# Altium PCB YAVP.PcbDoc (part 4 of 4)
Units mil, origin at the board's own origin, x right, y up, seen from the top; angles counter-clockwise.
Board outline 3188.93 x 2893.7 mil, 6 copper layers (Top Layer, Top, Mid-Layer 1, Top-Int, Mid-Layer 2, Bop-Int, Mid-Layer 3, Top-Mid, Mid-Layer 4, Bop-Mid, Bottom Layer, Bottom); 418 components, 278 nets, 1150 pads, 440 vias.
Unrouted connection lines stored in the file: 12.
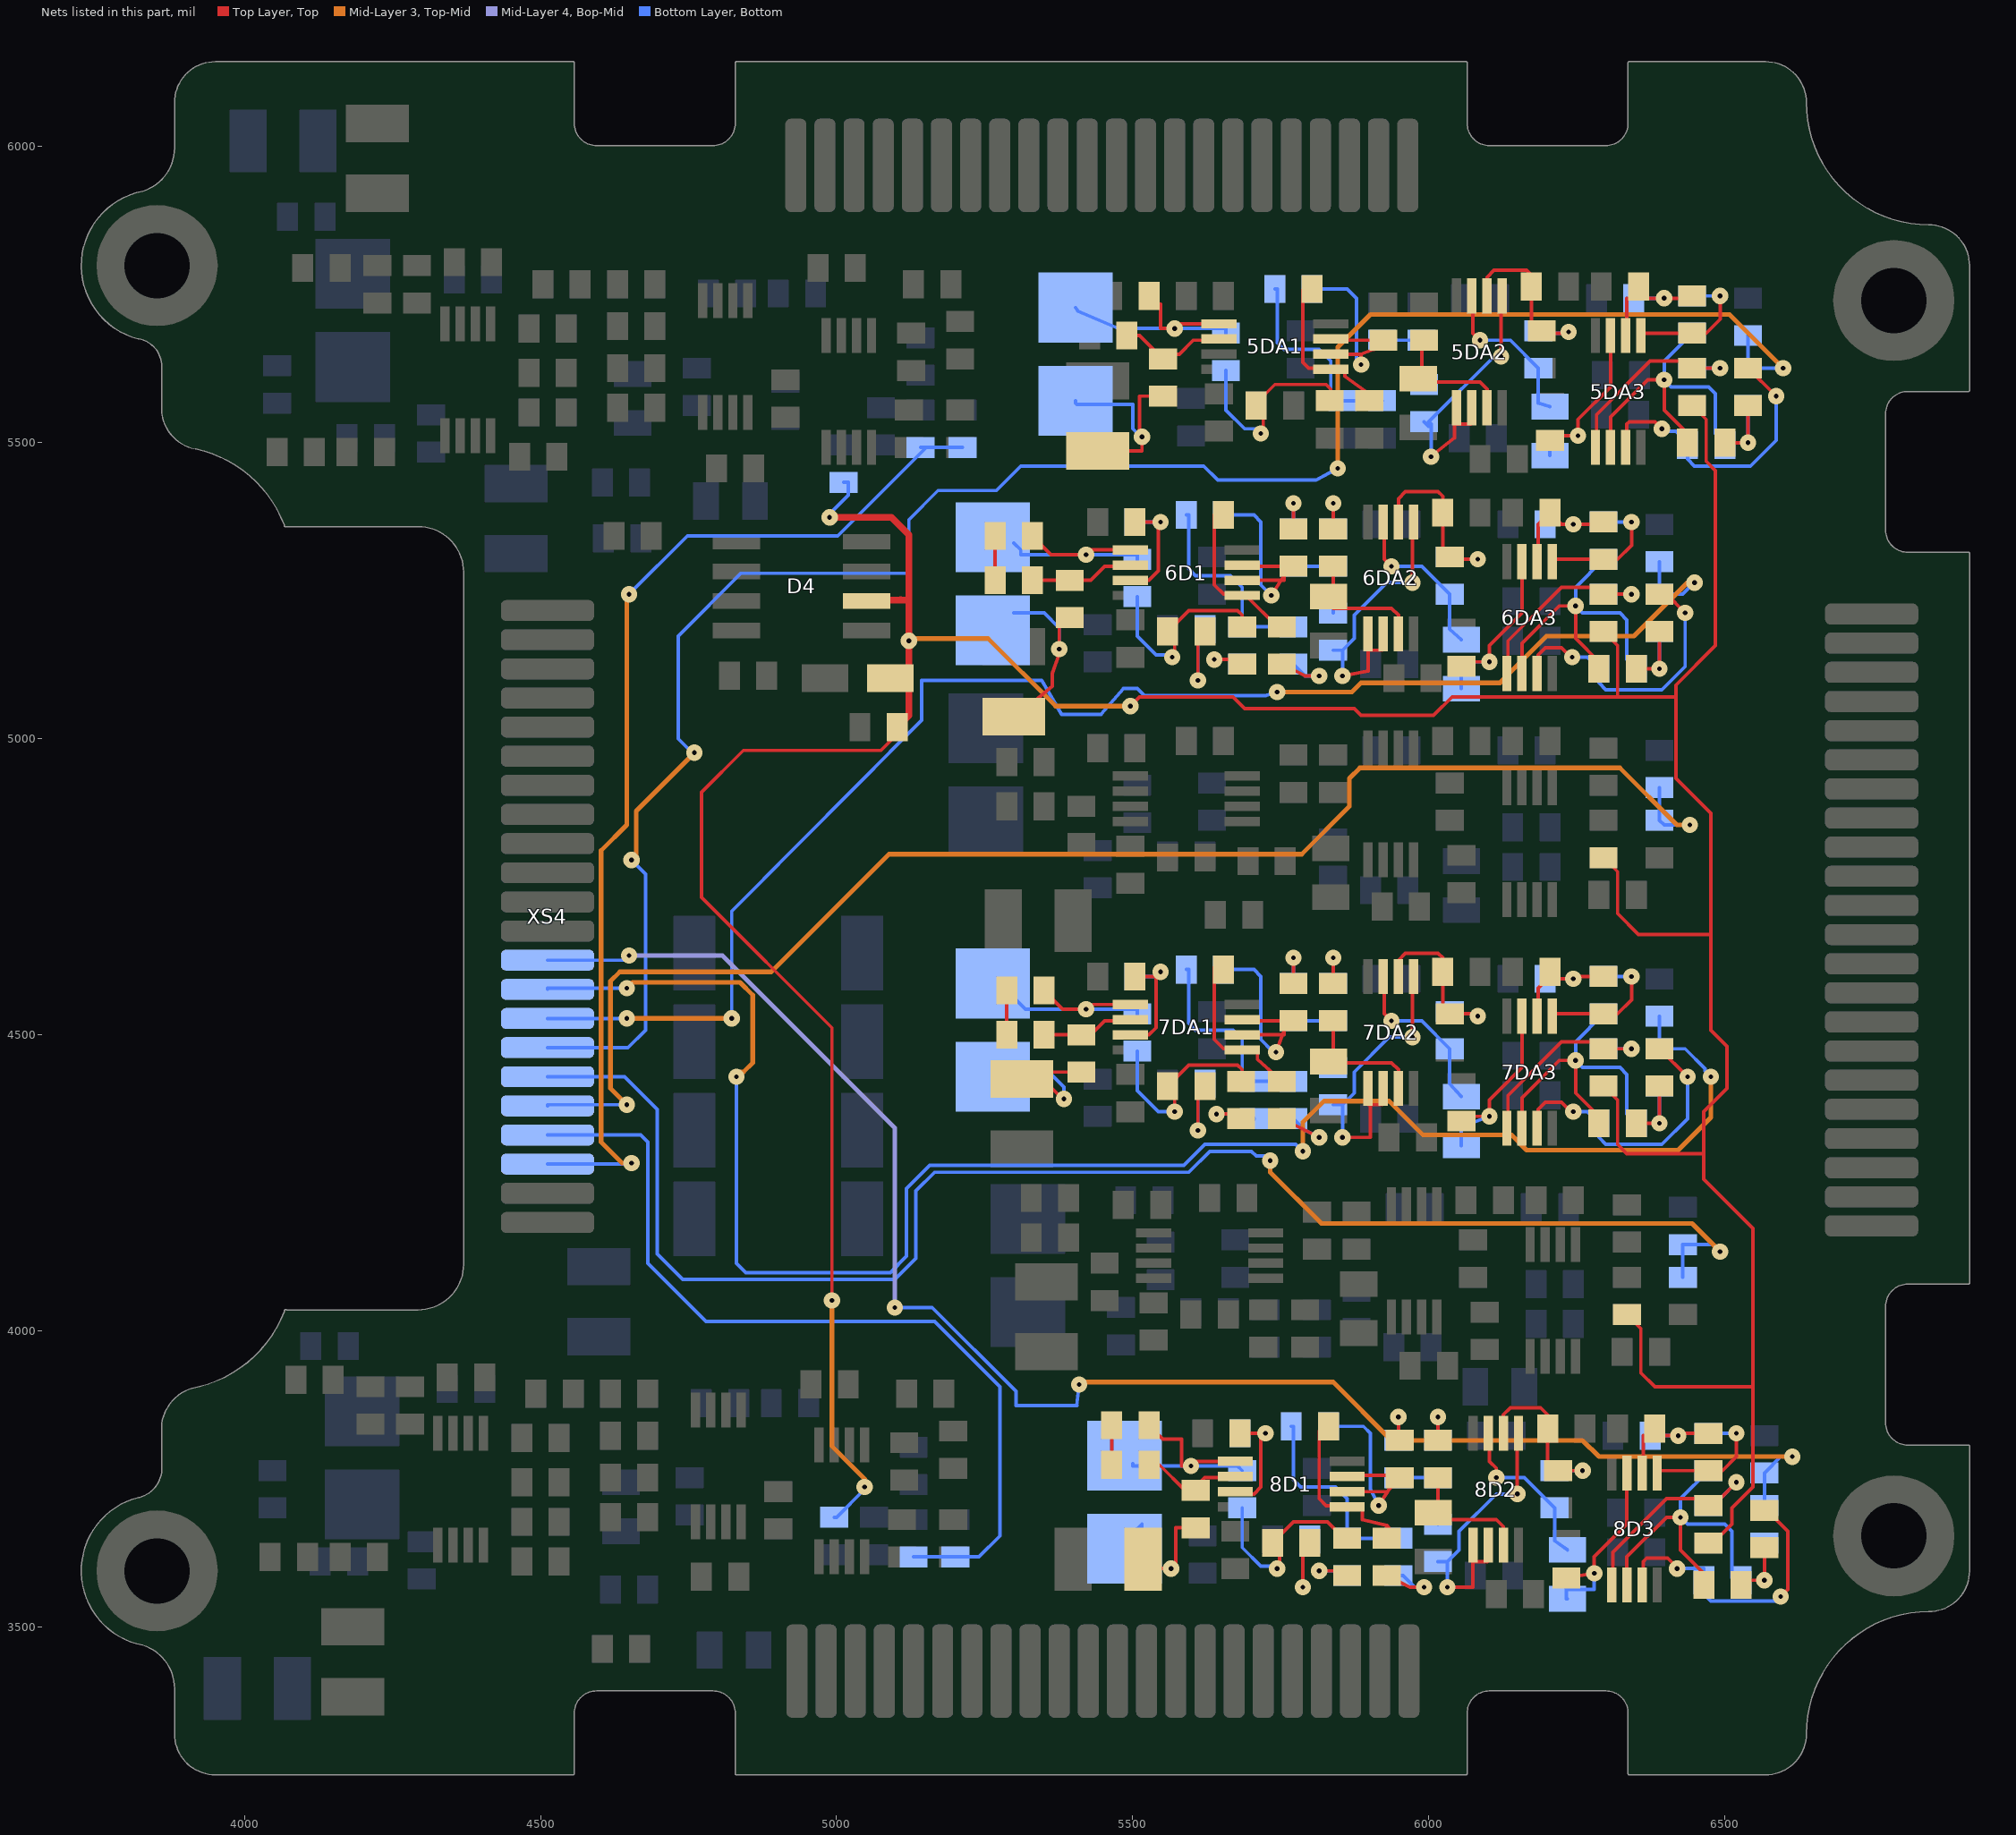
[diagram p8: the nets of this part, all layers, seen from the top]

## Via types
v1: diameter 27.56, hole 7.87, Top Layer, Top to Bottom Layer, Bottom, 440 vias

## Nets (pads, with @x,y where several pads share a name; then routed paths per layer and width w, separated by ;. In a path a pad name is that pad's centre, name@x,y a point inside that pad or via, vN(x,y) a via of type N, cw(c..) or ccw(c..) an arc to the next point about the centre after c; other vN are vias at no path point) (continued)
NET00479: 5C3.1 5DA1.1 5R4.1 5R5.2 | length 447.3
  Top Layer, Top w5.91: 5R4.1@5527.56,5748.03 5523.62,5748.03 5537.4,5734.25 5547.24,5734.25 5547.24,5692.91 v1(5570.87,5692.91) 5578.74,5700.79 5DA1.1@5645.67,5700.79
  Bottom Layer, Bottom w5.91: 5C3.1@5403.54,5728.35 5407.48,5722.44 5476.38,5692.91 v1(5570.87,5692.91) 5657.48,5692.91 5R5.2@5657.48,5685.04
NET00480: 5C1.2 5C3.2 5R1.2 | length 405.9
  Top Layer, Top w5.91: 5C1.2@5440.94,5486.22 5515.75,5486.22 v1(5515.75,5509.84) 5513.78,5509.84 5511.81,5511.81 5511.81,5578.74 5R1.2@5551.18,5578.74 5R1.2@5555.12,5574.8 ; 5R1.2@5555.12,5574.8 5562.99,5574.8 5562.99,5566.93 5R1.2@5555.12,5574.8
  Bottom Layer, Bottom w5.91: 5C3.2@5403.54,5570.87 5403.54,5566.93 5405.51,5564.96 5500,5564.96 5500,5523.62 5513.78,5509.84 v1(5515.75,5509.84)
NET00481: 5DA1.2 5R1.1 5R3.2 | length 186.8
  Top Layer, Top w5.91: 5R3.2@5490.16,5681.1 5511.81,5681.1 5R1.1@5551.18,5641.73 5559.06,5649.61 5578.74,5649.61 5602.36,5673.23 5645.67,5673.23 5DA1.2@5645.67,5675.2
NET00482: 5R5.1 5R6.2 5R8.2 | length 368.3
  Top Layer, Top w5.91: 5R6.2@5708.66,5562.99 5R6.2@5720.47,5562.99 ; v1(5716.54,5515.75) 5720.47,5519.69 5R6.2@5720.47,5562.99 ; 5R8.2@5832.68,5570.87 5834.65,5570.87 5834.65,5590.55 5826.77,5598.43 5740.16,5598.43 5720.47,5578.74 5R6.2@5720.47,5562.99
  Bottom Layer, Bottom w5.91: 5R5.1@5657.48,5622.05 5657.48,5555.12 5688.98,5523.62 5712.6,5523.62 5712.6,5519.69 v1(5716.54,5515.75)
NET00483: 5C4.1 5R9.1 5R10.2 | length 371.3
  Bottom Layer, Bottom w5.91: 5C4.1@5740.16,5759.84 5744.09,5759.84 5744.09,5669.29 5755.91,5657.48 5814.96,5657.48 5834.65,5637.8 5R9.1@5834.65,5570.87 ; 5R9.1@5854.33,5570.87 5R9.1@5834.65,5570.87 ; 5R10.2@5921.26,5570.87 5R9.1@5834.65,5570.87
NET00484: 5C5.1 5DA1.5 5R11.1 | length 313.6
  Top Layer, Top w5.91: 5C5.1@5803.15,5759.84 5793.31,5759.84 5789.37,5759.84 5787.4,5757.87 5787.4,5635.83 5797.24,5625.98 5807.09,5625.98 5834.65,5625.98 5DA1.5@5834.65,5624.02 5858.27,5624.02 5858.27,5612.2 5915.35,5570.87 5R11.1@5899.61,5570.87
NET00485: 5C4.2 5DA1.6 5DA1.7 5R12.2 | length 418.1
  Top Layer, Top w5.91: 5DA1.6@5834.65,5649.61 5885.83,5649.61 ; 5DA1.7@5834.65,5675.2 5834.65,5673.23 5R12.2@5905.51,5673.23 ; v1(5885.83,5631.89) 5885.83,5649.61 ; 5885.83,5649.61 5R12.2@5905.51,5657.48 ; 5R12.2@5905.51,5657.48 5907.48,5657.48 5R12.2@5923.23,5673.23 5R12.2@5905.51,5673.23 ; 5R12.2@5905.51,5657.48 5R12.2@5905.51,5673.23
  Bottom Layer, Bottom w5.91: 5C4.2@5803.15,5759.84 5862.2,5759.84 5877.95,5744.09 5877.95,5637.8 v1(5885.83,5631.89)
NET00486: 5C7.1 5DA2.3 5R15.1 | length 224.7
  Top Layer, Top w5.91: 5C7.1@5992.13,5598.43 5C7.1@5988.19,5602.36 ; 5R15.1@5992.13,5673.23 5988.19,5669.29 5C7.1@5988.19,5602.36 ; 5DA2.3@6098.43,5559.06 6098.43,5590.55 6086.61,5602.36 5C7.1@5988.19,5602.36
NET00487: 5C6.1 5R13.1 5R14.2 | length 143.4
  Bottom Layer, Bottom w5.91: 5R13.1@5921.26,5673.23 5R14.2@5988.19,5673.23 5988.19,5602.36 5C6.1@5992.13,5598.43
NET00488: 5C8.1 5DA2.7 5R17.1 | length 279.3
  Top Layer, Top w5.91: 5DA2.7@6072.83,5748.03 6074.8,5748.03 6074.8,5685.04 v1(6086.61,5673.23)
  Bottom Layer, Bottom w5.91: v1(6086.61,5673.23) 6137.8,5673.23 5R17.1@6185.04,5625.98 6185.04,5566.93 5C8.1@6204.72,5561.02
NET00489: 5C6.2 5DA2.1 5DA2.2 5DA2.5 | length 509.8
  Top Layer, Top w5.91: v1(6003.94,5476.38) 6007.87,5480.31 6043.31,5507.87 6043.31,5531.5 5DA2.1@6047.24,5531.5 ; 5DA2.1@6047.24,5559.06 6047.24,5539.37 5DA2.1@6047.24,5531.5 ; 5DA2.2@6072.83,5559.06 6070.87,5559.06 6070.87,5531.5 5DA2.1@6047.24,5531.5 ; v1(6122.05,5645.67) 6122.05,5748.03 5DA2.5@6124.02,5748.03
  Bottom Layer, Bottom w5.91: 5C6.2@5992.13,5535.43 6000,5527.56 5C6.2@6003.94,5527.56 ; v1(6003.94,5476.38) 5C6.2@6003.94,5527.56 ; v1(6122.05,5645.67) 6118.11,5645.67 6114.17,5649.61 6000,5535.43 6003.94,5531.5 5C6.2@6003.94,5527.56
NET00490: 5DA2.6 5R16.1 5R17.2 5R18.1 | length 338.2
  Top Layer, Top w5.91: 5DA2.6@6098.43,5748.03 6098.43,5779.53 6110.24,5791.34 6165.35,5791.34 6173.23,5783.46 5R16.1@6173.23,5763.78 6173.23,5685.04 6181.1,5685.04 6187.01,5685.04 5R18.1@6188.98,5687.01 ; 5R18.1@6190.94,5688.98 5R18.1@6188.98,5687.01 ; v1(6236.22,5687.01) 6234.25,5685.04 6188.98,5685.04 5R18.1@6188.98,5687.01
  Bottom Layer, Bottom w5.91: 5R17.2@6185.04,5688.98 6185.04,5685.04 6234.25,5685.04 v1(6236.22,5687.01)
NET00493: 5C8.2 5DA3.3 5R19.1 | length 327.9
  Top Layer, Top w5.91: 5R19.1@6204.72,5503.94 6204.72,5511.81 v1(6251.97,5511.81) 6251.97,5539.37 6307.09,5594.49 5DA3.3@6307.09,5681.1
  Bottom Layer, Bottom w5.91: 5C8.2@6204.72,5478.35 6204.72,5511.81 v1(6251.97,5511.81)
NET00494: 5DA3.2 5R20.1 5R21.2 5R22.1 | length 255.8
  Top Layer, Top w5.91: 5DA3.2@6332.68,5681.1 6334.65,5681.1 6334.65,5744.09 6342.52,5744.09 6342.52,5751.97 5R20.1@6354.33,5763.78 6366.14,5751.97 6366.14,5744.09 v1(6397.64,5744.09) 6444.88,5744.09 5R21.2@6444.88,5748.03
  Bottom Layer, Bottom w5.91: 5R22.1@6346.46,5744.09 v1(6397.64,5744.09)
NET00495: 5DA3.1 5R21.1 5R23.2 | length 234.2
  Top Layer, Top w5.91: 5DA3.1@6358.27,5681.1 6358.27,5685.04 5R21.1@6444.88,5685.04 6468.5,5685.04 6492.13,5708.66 v1(6492.13,5748.03)
  Bottom Layer, Bottom w5.91: 5R23.2@6444.88,5748.03 v1(6492.13,5748.03)
NET00498: 5C9.1 5DA3.6 5R23.1 5R26.2 | length 577.3
  Top Layer, Top w5.91: 5DA3.6@6307.09,5492.13 6307.09,5543.31 6370.08,5606.3 v1(6397.64,5606.3) 6397.64,5555.12 6437.01,5515.75 5R26.2@6437.01,5500
  Bottom Layer, Bottom w5.91: 5R23.1@6444.88,5685.04 6397.64,5637.8 v1(6397.64,5606.3) 6409.45,5594.49 6472.44,5594.49 6484.25,5582.68 6484.25,5515.75 5C9.1@6500,5496.06
NET00499: 5C9.2 5DA3.7 5R27.2 | length 500.6
  Top Layer, Top w5.91: 5DA3.7@6332.68,5492.13 6334.65,5492.13 6334.65,5531.5 6338.58,5535.43 6381.89,5535.43 v1(6393.7,5523.62) ; 5R27.2@6539.37,5625.98 v1(6586.61,5578.74)
  Bottom Layer, Bottom w5.91: v1(6393.7,5523.62) 6397.64,5519.69 6417.32,5519.69 5C9.2@6437.01,5496.06 6437.01,5472.44 6448.82,5460.63 6543.31,5460.63 6586.61,5503.94 v1(6586.61,5578.74)
NET00500: 5R26.1 5R27.1 5R28.1 | length 165.4
  Top Layer, Top w5.91: 5R26.1@6500,5500 v1(6539.37,5500) 5R27.1@6539.37,5562.99
  Bottom Layer, Bottom w5.91: v1(6539.37,5500) 5R28.1@6539.37,5562.99
NET00502: 5DA3.5 5R24.1 5R25.1 | length 362.3
  Top Layer, Top w5.91: 5DA3.5@6281.5,5492.13 6283.46,5492.13 6283.46,5547.24 6374.02,5637.8 6444.88,5637.8 5R24.1@6444.88,5625.98 v1(6492.13,5625.98)
  Bottom Layer, Bottom w5.91: 5R25.1@6444.88,5625.98 v1(6492.13,5625.98)
NET00504: 6R3.1 6R4.2 | length 74.8
  Top Layer, Top w5.91: 6R3.1@5267.72,5267.72 6R4.2@5267.72,5342.52
NET00505: 6R8.1 6R9.2 | length 110.2
  Top Layer, Top w5.91: v1(5637.8,5133.86) 5685.04,5133.86 6R8.1@5685.04,5125.98
  Bottom Layer, Bottom w5.91: v1(5637.8,5133.86) 5685.04,5133.86 6R9.2@5685.04,5125.98
NET00506: 6R12.1 6R13.2 | length 86.6
  Top Layer, Top w5.91: 6R12.1@5771.65,5354.33 v1(5771.65,5397.64)
  Bottom Layer, Bottom w5.91: 6R13.2@5771.65,5354.33 v1(5771.65,5397.64)
NET00507: 6R6.1 6R7.2 | length 190.6
  Top Layer, Top w5.91: v1(5610.24,5098.43) 5610.24,5181.1 6R6.1@5622.05,5181.1
  Bottom Layer, Bottom w5.91: v1(5610.24,5098.43) 5610.24,5181.1 5618.11,5181.1 6R7.2@5622.05,5185.04
NET00508: 6R10.1 6R11.2 | length 119.1
  Top Layer, Top w5.91: 6R11.2@5751.97,5125.98 5791.34,5106.3 v1(5814.96,5106.3)
  Bottom Layer, Bottom w5.91: 6R10.1@5771.65,5125.98 5791.34,5106.3 v1(5814.96,5106.3)
NET00509: 6R14.1 6R15.2 | length 86.6
  Top Layer, Top w5.91: 6R15.2@5838.58,5354.33 v1(5838.58,5397.64)
  Bottom Layer, Bottom w5.91: 6R14.1@5838.58,5354.33 v1(5838.58,5397.64)
NET00511: 6C2.1 6D1.3 6R2.1 | length 223.1
  Top Layer, Top w5.91: 6D1.3@5496.06,5267.72 5527.56,5267.72 5543.31,5283.46 v1@5543.31,5366.14 ; 6C2.1@5503.94,5366.14 v1@5543.31,5366.14 ; v1(5547.24,5366.14) v1@5543.31,5366.14
  Bottom Layer, Bottom w5.91: 6R2.1@5503.94,5366.14 v1(5547.24,5366.14)
NET00512: 6C3.1 6D1.1 6R4.1 6R5.2 | length 411
  Top Layer, Top w5.91: 6R4.1@5330.71,5342.52 5362.2,5311.02 v1(5421.26,5311.02) 5429.13,5318.9 6D1.1@5496.06,5318.9
  Bottom Layer, Bottom w5.91: 6C3.1@5299.21,5330.71 5311.02,5318.9 5311.02,5311.02 v1(5421.26,5311.02) 5507.87,5311.02 6R5.2@5507.87,5303.15
NET00513: 6C1.2 6C3.2 6R1.2 | length 383.1
  Top Layer, Top w5.91: 6C1.2@5299.21,5037.4 5303.15,5037.4 5364.17,5088.58 5364.17,5110.24 5375.98,5143.7 v1(5375.98,5151.57) 5375.98,5198.82 6R1.2@5399.61,5198.82 ; 6R1.2@5393.7,5204.72 6R1.2@5399.61,5198.82 ; 6R1.2@5399.61,5198.82 5407.48,5198.82 5413.39,5192.91 5405.51,5192.91 6R1.2@5399.61,5198.82
  Bottom Layer, Bottom w5.91: 6C3.2@5299.21,5212.6 5350.39,5212.6 5375.98,5187.01 v1(5375.98,5151.57)
NET00514: 6D1.2 6R1.1 6R3.2 | length 175.6
  Top Layer, Top w5.91: 6R3.2@5330.71,5267.72 6R1.1@5393.7,5267.72 5429.13,5267.72 5452.76,5291.34 5492.13,5291.34 6D1.2@5496.06,5293.31
NET00515: 6R5.1 6R6.2 6R8.2 | length 361
  Top Layer, Top w5.91: v1(5566.93,5137.8) 5570.87,5141.73 5570.87,5181.1 6R6.2@5559.06,5181.1 5594.49,5216.54 5677.17,5216.54 5685.04,5208.66 6R8.2@5685.04,5188.98
  Bottom Layer, Bottom w5.91: 6R5.1@5507.87,5240.16 5507.87,5173.23 5539.37,5141.73 5562.99,5141.73 v1(5566.93,5137.8)
NET00516: 6C4.1 6R9.1 6R10.2 | length 351.6
  Bottom Layer, Bottom w5.91: 6C4.1@5590.55,5377.95 5594.49,5377.95 5594.49,5287.4 5606.3,5275.59 5665.35,5275.59 5685.04,5255.91 6R9.1@5685.04,5188.98 6R10.2@5771.65,5188.98
NET00517: 6C5.1 6D1.5 6R11.1 | length 303.3
  Top Layer, Top w5.91: 6C5.1@5653.54,5377.95 5637.8,5377.95 5637.8,5259.84 5653.54,5244.09 5657.48,5244.09 5685.04,5244.09 6D1.5@5685.04,5242.13 5685.04,5240.16 5692.91,5240.16 5744.09,5188.98 5763.78,5188.98 6R11.1@5751.97,5188.98
NET00518: 6C4.2 6D1.6 6D1.7 6R12.2 | length 434.3
  Top Layer, Top w5.91: 6D1.6@5685.04,5267.72 5750.81,5267.72 ; 6D1.7@5685.04,5293.31 5685.04,5291.34 5755.91,5291.34 6R12.2@5755.91,5275.59 ; v1(5734.25,5242.13) 5750.81,5267.72 ; 6R12.2@5771.65,5291.34 6R12.2@5755.91,5275.59 ; 5750.81,5267.72 6R12.2@5755.91,5275.59 ; 5750.81,5267.72 5755.91,5267.72 6R12.2@5755.91,5275.59
  Bottom Layer, Bottom w5.91: 6C4.2@5653.54,5377.95 5704.72,5377.95 5716.54,5366.14 5716.54,5259.84 5736.22,5240.16 v1(5734.25,5242.13)
NET00519: 6C7.1 6DA2.3 6R15.1 | length 225.4
  Top Layer, Top w5.91: 6C7.1@5830.71,5240.16 6C7.1@5838.58,5240.16 ; 6R15.1@5838.58,5291.34 6C7.1@5838.58,5240.16 ; 6DA2.3@5948.82,5177.17 5948.82,5208.66 5937.01,5220.47 5838.58,5220.47 6C7.1@5838.58,5240.16
NET00520: 6C6.1 6R13.1 6R14.2 | length 145.7
  Bottom Layer, Bottom w5.91: 6R13.1@5771.65,5291.34 6R14.2@5838.58,5291.34 6C6.1@5838.58,5212.6
NET00521: 6C8.1 6DA2.7 6R17.1 | length 285.2
  Top Layer, Top w5.91: 6DA2.7@5923.23,5366.14 5925.2,5366.14 5925.2,5303.15 v1(5937.01,5291.34)
  Bottom Layer, Bottom w5.91: v1(5937.01,5291.34) 5988.19,5291.34 6R17.1@6035.43,5244.09 6035.43,5185.04 6C8.1@6055.12,5167.32
NET00522: 6C6.2 6DA2.1 6DA2.2 6DA2.5 | length 510.5
  Top Layer, Top w5.91: v1(5854.33,5106.3) 5897.64,5114.17 6DA2.1@5897.64,5149.61 ; 6DA2.1@5897.64,5177.17 6DA2.1@5897.64,5149.61 ; 6DA2.2@5923.23,5177.17 5921.26,5177.17 5921.26,5149.61 6DA2.1@5897.64,5149.61 ; v1(5972.44,5263.78) 5972.44,5362.2 6DA2.5@5974.41,5366.14
  Bottom Layer, Bottom w5.91: 6C6.2@5838.58,5149.61 6C6.2@5854.33,5149.61 ; v1(5854.33,5106.3) 6C6.2@5854.33,5149.61 ; v1(5972.44,5263.78) 5964.57,5263.78 5929.13,5263.78 5874.02,5208.66 5874.02,5169.29 6C6.2@5854.33,5149.61
NET00523: 6DA2.6 6R16.1 6R17.2 6R18.1 | length 346.4
  Top Layer, Top w5.91: 6DA2.6@5948.82,5366.14 5948.82,5405.51 5960.63,5417.32 6015.75,5417.32 6023.62,5409.45 6023.62,5397.64 6R16.1@6023.62,5381.89 6023.62,5303.15 6031.5,5303.15 6037.4,5303.15 6R18.1@6039.37,5305.12 ; 6R18.1@6035.43,5307.09 6037.4,5305.12 6R18.1@6039.37,5305.12 ; v1(6082.68,5303.15) 6039.37,5303.15 6R18.1@6039.37,5305.12
  Bottom Layer, Bottom w5.91: 6R17.2@6035.43,5307.09 6035.43,5303.15 v1(6082.68,5303.15)
NET00526: 6C8.2 6DA3.3 6R19.1 | length 339.8
  Top Layer, Top w5.91: 6R19.1@6055.12,5122.05 6055.12,5129.92 v1(6102.36,5129.92) 6102.36,5157.48 6157.48,5212.6 6DA3.3@6157.48,5299.21
  Bottom Layer, Bottom w5.91: 6C8.2@6055.12,5084.65 6055.12,5088.58 6055.12,5129.92 v1(6102.36,5129.92)
NET00527: 6DA3.2 6R20.1 6R21.2 6R22.1 | length 242.7
  Top Layer, Top w5.91: 6DA3.2@6183.07,5299.21 6185.04,5299.21 6185.04,5362.2 6R20.1@6204.72,5381.89 6224.41,5362.2 v1(6244.09,5362.2) 6295.28,5362.2 6R21.2@6295.28,5366.14
  Bottom Layer, Bottom w5.91: 6R22.1@6196.85,5362.2 v1(6244.09,5362.2)
NET00528: 6DA3.1 6R21.1 6R23.2 | length 234.2
  Top Layer, Top w5.91: 6DA3.1@6208.66,5299.21 6208.66,5303.15 6R21.1@6295.28,5303.15 6318.9,5303.15 6342.52,5326.77 v1(6342.52,5366.14)
  Bottom Layer, Bottom w5.91: 6R23.2@6295.28,5366.14 v1(6342.52,5366.14)
NET00531: 6C9.1 6DA3.6 6R23.1 6R26.2 | length 574.3
  Top Layer, Top w5.91: 6DA3.6@6157.48,5110.24 6157.48,5161.42 6220.47,5224.41 v1(6248.03,5224.41) 6248.03,5169.29 6287.4,5129.92 6R26.2@6287.4,5118.11
  Bottom Layer, Bottom w5.91: 6R23.1@6295.28,5303.15 6248.03,5255.91 v1(6248.03,5224.41) 6259.84,5212.6 6322.83,5212.6 6334.65,5200.79 6334.65,5133.86 6C9.1@6350.39,5118.11
NET00532: 6C9.2 6DA3.7 6R27.2 | length 492.8
  Top Layer, Top w5.91: 6DA3.7@6183.07,5110.24 6185.04,5110.24 6185.04,5141.73 6196.85,5153.54 6224.41,5153.54 6240.16,5137.8 v1(6242.13,5137.8) ; 6R27.2@6389.76,5244.09 6401.57,5244.09 v1(6433.07,5212.6)
  Bottom Layer, Bottom w5.91: v1(6242.13,5137.8) 6267.72,5137.8 6C9.2@6287.4,5118.11 6287.4,5094.49 6299.21,5082.68 6393.7,5082.68 6433.07,5122.05 6433.07,5204.72 v1(6433.07,5212.6)
NET00533: 6R26.1 6R27.1 6R28.1 | length 165.4
  Top Layer, Top w5.91: 6R26.1@6350.39,5118.11 v1(6389.76,5118.11) 6R27.1@6389.76,5181.1
  Bottom Layer, Bottom w5.91: v1(6389.76,5118.11) 6R28.1@6389.76,5181.1
NET00535: 6DA3.5 6R24.1 6R25.1 | length 362.3
  Top Layer, Top w5.91: 6DA3.5@6131.89,5110.24 6133.86,5110.24 6133.86,5165.35 6224.41,5255.91 6295.28,5255.91 6R24.1@6295.28,5244.09 v1(6342.52,5244.09)
  Bottom Layer, Bottom w5.91: 6R25.1@6295.28,5244.09 v1(6342.52,5244.09)
NET00634: 7R3.1 7R4.2 | length 74.8
  Top Layer, Top w5.91: 7R3.1@5287.4,4500 7R4.2@5287.4,4574.8
NET00635: 7R8.1 7R9.2 | length 124
  Top Layer, Top w5.91: v1(5641.73,4366.14) 5685.04,4366.14 5685.04,4358.27 7R8.1@5683.07,4358.27
  Bottom Layer, Bottom w5.91: v1(5641.73,4366.14) 5685.04,4366.14 5685.04,4358.27 7R9.2@5704.72,4358.27
NET00636: 7R12.1 7R13.2 | length 86.6
  Top Layer, Top w5.91: 7R12.1@5771.65,4586.61 v1(5771.65,4629.92)
  Bottom Layer, Bottom w5.91: 7R13.2@5771.65,4586.61 v1(5771.65,4629.92)
NET00637: 7R6.1 7R7.2 | length 174.9
  Top Layer, Top w5.91: v1(5610.24,4338.58) 5610.24,4413.39 7R6.1@5622.05,4413.39
  Bottom Layer, Bottom w5.91: v1(5610.24,4338.58) 5610.24,4413.39 5618.11,4413.39 7R7.2@5622.05,4417.32
NET00638: 7R10.1 7R11.2 | length 124.7
  Top Layer, Top w5.91: 7R11.2@5751.97,4358.27 5791.34,4338.58 v1(5814.96,4326.77)
  Bottom Layer, Bottom w5.91: 7R10.1@5771.65,4358.27 5791.34,4338.58 v1(5814.96,4326.77)
NET00639: 7R14.1 7R15.2 | length 86.6
  Top Layer, Top w5.91: 7R15.2@5838.58,4586.61 v1(5838.58,4629.92)
  Bottom Layer, Bottom w5.91: 7R14.1@5838.58,4586.61 v1(5838.58,4629.92)
NET00641: 7C2.1 7DA1.3 7R2.1 | length 228
  Top Layer, Top w5.91: 7DA1.3@5496.06,4500 5527.56,4500 5539.37,4511.81 v1@5539.37,4598.43 ; 7C2.1@5503.94,4598.43 v1@5539.37,4598.43 ; v1(5547.24,4606.3) v1@5539.37,4598.43
  Bottom Layer, Bottom w5.91: 7R2.1@5503.94,4598.43 5539.37,4598.43 v1(5547.24,4606.3)
NET00642: 7C3.1 7DA1.1 7R4.1 7R5.2 | length 385.8
  Top Layer, Top w5.91: 7R4.1@5350.39,4574.8 5381.89,4543.31 v1(5421.26,4543.31) 5433.07,4551.18 7DA1.1@5496.06,4551.18
  Bottom Layer, Bottom w5.91: 7C3.1@5299.21,4562.99 5318.9,4543.31 v1(5421.26,4543.31) 5507.87,4543.31 7R5.2@5507.87,4535.43
NET00643: 7C1.2 7C3.2 7R1.2 | length 352.1
  Top Layer, Top w5.91: 7C1.2@5273.62,4429.13 5277.56,4425.2 7C1.2@5312.99,4425.2 7C1.2@5338.58,4425.2 ; 7C1.2@5330.71,4401.57 5332.68,4399.61 5332.68,4419.29 7C1.2@5338.58,4425.2 ; v1(5383.86,4391.73) 5381.89,4391.73 5344.49,4429.13 7C1.2@5342.52,4429.13 ; 7R1.2@5413.39,4437.01 5350.39,4437.01 7C1.2@5342.52,4429.13 ; 7C1.2@5338.58,4425.2 7C1.2@5342.52,4429.13
  Bottom Layer, Bottom w5.91: 7C3.2@5299.21,4444.88 5350.39,4444.88 5383.86,4411.42 v1(5383.86,4391.73)
NET00644: 7DA1.2 7R1.1 7R3.2 | length 157.4
  Top Layer, Top w5.91: 7R3.2@5350.39,4500 7R1.1@5413.39,4500 5429.13,4500 5452.76,4523.62 5496.06,4523.62 7DA1.2@5496.06,4525.59
NET00645: 7R5.1 7R6.2 7R8.2 | length 365.3
  Top Layer, Top w5.91: v1(5570.87,4370.08) 5570.87,4413.39 7R6.2@5559.06,4413.39 5594.49,4448.82 5677.17,4448.82 5685.04,4440.94 5685.04,4421.26 7R8.2@5683.07,4421.26
  Bottom Layer, Bottom w5.91: 7R5.1@5507.87,4472.44 5507.87,4405.51 5543.31,4370.08 v1(5570.87,4370.08)
NET00646: 7C4.1 7R9.1 7R10.2 | length 373.6
  Bottom Layer, Bottom w5.91: 7C4.1@5590.55,4610.24 5594.49,4610.24 5594.49,4519.69 5606.3,4507.87 5669.29,4507.87 5685.04,4492.13 7R9.1@5685.04,4421.26 ; 7R9.1@5704.72,4421.26 7R9.1@5685.04,4421.26 ; 7R10.2@5771.65,4421.26 7R9.1@5685.04,4421.26
NET00647: 7C5.1 7DA1.5 7R11.1 | length 294.3
  Top Layer, Top w5.91: 7C5.1@5653.54,4610.24 5641.73,4610.24 5637.8,4614.17 5637.8,4492.13 5653.54,4476.38 5657.48,4476.38 5685.04,4476.38 7DA1.5@5685.04,4474.41 5685.04,4472.44 5710.63,4474.41 5710.63,4458.66 7R11.1@5751.97,4421.26
NET00648: 7C4.2 7DA1.6 7DA1.7 7R12.2 | length 437.7
  Top Layer, Top w5.91: 7DA1.6@5685.04,4500 5753.13,4500 ; 7DA1.7@5685.04,4525.59 5685.04,4523.62 5755.91,4523.62 7R12.2@5755.91,4507.87 ; v1(5742.13,4470.47) 5753.13,4500 ; 7R12.2@5771.65,4523.62 7R12.2@5755.91,4507.87 ; 5753.13,4500 7R12.2@5755.91,4507.87 ; 5753.13,4500 5755.91,4500 7R12.2@5755.91,4507.87
  Bottom Layer, Bottom w5.91: 7C4.2@5653.54,4610.24 5704.72,4610.24 5716.54,4598.43 5716.54,4492.13 5736.22,4472.44 v1(5742.13,4470.47)
NET00649: 7C7.1 7DA2.3 7R15.1 | length 225.4
  Top Layer, Top w5.91: 7C7.1@5838.58,4444.88 7C7.1@5838.58,4452.76 ; 7R15.1@5838.58,4523.62 7C7.1@5838.58,4452.76 ; 7DA2.3@5948.82,4409.45 5948.82,4440.94 5937.01,4452.76 7C7.1@5838.58,4452.76
NET00650: 7C6.1 7R13.1 7R14.2 | length 145.7
  Bottom Layer, Bottom w5.91: 7R13.1@5771.65,4523.62 7R14.2@5838.58,4523.62 7C6.1@5838.58,4444.88
NET00651: 7C8.1 7DA2.7 7R17.1 | length 286.5
  Top Layer, Top w5.91: 7DA2.7@5923.23,4598.43 5925.2,4594.49 5925.2,4535.43 v1(5937.01,4523.62)
  Bottom Layer, Bottom w5.91: v1(5937.01,4523.62) 5988.19,4523.62 7R17.1@6035.43,4476.38 6035.43,4417.32 7C8.1@6055.12,4395.67
NET00652: 7C6.2 7DA2.1 7DA2.2 7DA2.5 | length 544.4
  Top Layer, Top w5.91: v1(5854.33,4326.77) 5901.57,4326.77 7DA2.1@5901.57,4381.89 ; 7DA2.1@5897.64,4409.45 5897.64,4381.89 7DA2.1@5901.57,4381.89 ; 7DA2.2@5923.23,4409.45 5921.26,4409.45 5921.26,4381.89 7DA2.1@5901.57,4381.89 ; v1(5972.44,4496.06) 5972.44,4598.43 7DA2.5@5974.41,4598.43
  Bottom Layer, Bottom w5.91: 7C6.2@5838.58,4381.89 7C6.2@5854.33,4381.89 ; v1(5854.33,4326.77) 7C6.2@5854.33,4381.89 ; v1(5972.44,4496.06) 5968.5,4496.06 5933.07,4496.06 5874.02,4437.01 5874.02,4401.57 7C6.2@5854.33,4381.89
NET00653: 7DA2.6 7R16.1 7R17.2 7R18.1 | length 318.5
  Top Layer, Top w5.91: 7DA2.6@5948.82,4598.43 5948.82,4625.98 5960.63,4637.8 6015.75,4637.8 6023.62,4629.92 7R16.1@6023.62,4606.3 6023.62,4535.43 7R18.1@6035.43,4535.43 6078.74,4535.43 v1(6082.68,4531.5)
  Bottom Layer, Bottom w5.91: 7R17.2@6035.43,4539.37 6035.43,4535.43 6078.74,4535.43 v1(6082.68,4531.5)
NET00656: 7C8.2 7DA3.3 7R19.1 | length 329.2
  Top Layer, Top w5.91: 7R19.1@6055.12,4354.33 6055.12,4362.2 v1(6102.36,4362.2) 6102.36,4389.76 6157.48,4444.88 7DA3.3@6157.48,4531.5
  Bottom Layer, Bottom w5.91: 7C8.2@6055.12,4312.99 6055.12,4344.49 v1(6102.36,4362.2)
NET00657: 7DA3.2 7R20.1 7R21.2 7R22.1 | length 231.5
  Top Layer, Top w5.91: 7DA3.2@6183.07,4531.5 6185.04,4531.5 6185.04,4578.74 6192.91,4586.61 6192.91,4594.49 7R20.1@6204.72,4606.3 6216.54,4594.49 v1(6244.09,4594.49) 6244.09,4598.43 7R21.2@6295.28,4598.43
  Bottom Layer, Bottom w5.91: 7R22.1@6196.85,4594.49 v1(6244.09,4594.49)
NET00658: 7DA3.1 7R21.1 7R23.2 | length 234.2
  Top Layer, Top w5.91: 7DA3.1@6208.66,4531.5 6208.66,4535.43 7R21.1@6295.28,4535.43 6318.9,4535.43 6342.52,4559.06 v1(6342.52,4598.43)
  Bottom Layer, Bottom w5.91: 7R23.2@6295.28,4598.43 v1(6342.52,4598.43)
NET00661: 7C9.1 7DA3.6 7R23.1 7R26.2 | length 574.3
  Top Layer, Top w5.91: 7DA3.6@6157.48,4342.52 6157.48,4393.7 6220.47,4456.69 v1(6248.03,4456.69) 6248.03,4401.57 6287.4,4362.2 7R26.2@6287.4,4350.39
  Bottom Layer, Bottom w5.91: 7R23.1@6295.28,4535.43 6248.03,4488.19 v1(6248.03,4456.69) 6259.84,4444.88 6322.83,4444.88 6334.65,4433.07 6334.65,4366.14 7C9.1@6350.39,4350.39
NET00662: 7C9.2 7DA3.7 7R27.2 | length 489.1
  Top Layer, Top w5.91: 7DA3.7@6183.07,4342.52 6185.04,4342.52 6185.04,4374.02 6196.85,4385.83 6224.41,4385.83 6240.16,4370.08 v1(6244.09,4370.08) ; 7R27.2@6389.76,4476.38 v1(6437.01,4429.13)
  Bottom Layer, Bottom w5.91: v1(6244.09,4370.08) 6267.72,4370.08 7C9.2@6287.4,4350.39 6287.4,4326.77 6299.21,4314.96 6393.7,4314.96 6437.01,4358.27 v1(6437.01,4429.13)
NET00663: 7R26.1 7R27.1 7R28.1 | length 165.4
  Top Layer, Top w5.91: 7R26.1@6350.39,4350.39 v1(6389.76,4350.39) 7R27.1@6389.76,4413.39
  Bottom Layer, Bottom w5.91: v1(6389.76,4350.39) 7R28.1@6389.76,4413.39
NET00665: 7DA3.5 7R24.1 7R25.1 | length 360.5
  Top Layer, Top w5.91: 7DA3.5@6131.89,4342.52 6133.86,4358.27 6133.86,4397.64 6224.41,4488.19 6295.28,4488.19 7R24.1@6295.28,4476.38 v1(6342.52,4476.38)
  Bottom Layer, Bottom w5.91: 7R25.1@6295.28,4476.38 v1(6342.52,4476.38)
NET00667: 8R3.1 8R4.2 | length 66.9
  Top Layer, Top w5.91: 8R3.1@5464.57,3773.62 8R4.2@5464.57,3840.55
NET00668: 8R8.1 8R9.2 | length 110.2
  Top Layer, Top w5.91: v1(5814.96,3594.49) 5862.2,3594.49 8R8.1@5862.2,3586.61
  Bottom Layer, Bottom w5.91: v1(5814.96,3594.49) 5862.2,3594.49 8R9.2@5862.2,3586.61
NET00669: 8R12.1 8R13.2 | length 79.6
  Top Layer, Top w5.91: v1(5948.82,3854.33) 5948.82,3816.93 8R12.1@5950.79,3814.96
  Bottom Layer, Bottom w5.91: 8R13.2@5948.82,3814.96 v1(5948.82,3854.33)
NET00670: 8R6.1 8R7.2 | length 175.7
  Top Layer, Top w5.91: v1(5787.4,3566.93) 5787.4,3641.73 8R6.1@5799.21,3641.73
  Bottom Layer, Bottom w5.91: v1(5787.4,3566.93) 5787.4,3641.73 5791.34,3641.73 5793.31,3641.73 8R7.2@5799.21,3647.64
NET00671: 8R10.1 8R11.2 | length 119.1
  Top Layer, Top w5.91: 8R11.2@5929.13,3586.61 5968.5,3566.93 v1(5992.13,3566.93)
  Bottom Layer, Bottom w5.91: 8R10.1@5948.82,3586.61 5956.69,3586.61 5976.38,3566.93 v1(5992.13,3566.93)
NET00672: 8R14.1 8R15.2 | length 78.7
  Top Layer, Top w5.91: 8R15.2@6015.75,3814.96 v1(6015.75,3854.33)
  Bottom Layer, Bottom w5.91: 8R14.1@6015.75,3814.96 v1(6015.75,3854.33)
NET00674: 8C2.1 8D1.3 8R2.1 | length 229.3
  Top Layer, Top w5.91: 8D1.3@5673.23,3728.35 5673.23,3724.41 5704.72,3724.41 5716.54,3736.22 v1@5716.54,3826.77 ; 8C2.1@5681.1,3826.77 v1@5716.54,3826.77 ; v1(5724.41,3826.77) v1@5716.54,3826.77
  Bottom Layer, Bottom w5.91: 8R2.1@5681.1,3826.77 v1(5724.41,3826.77)
NET00675: 8C3.1 8D1.1 8R4.1 8R5.2 | length 400.8
  Top Layer, Top w5.91: 8R4.1@5527.56,3840.55 5551.18,3816.93 5582.68,3816.93 5582.68,3771.65 v1(5598.43,3771.65) 5598.43,3779.53 5669.29,3779.53 8D1.1@5673.23,3779.53
  Bottom Layer, Bottom w5.91: 8C3.1@5500,3775.59 5500,3771.65 v1(5598.43,3771.65) 5677.17,3771.65 8R5.2@5685.04,3763.78
NET00676: 8C1.2 8C3.2 8R1.2 | length 316.4
  Top Layer, Top w5.91: 8C1.2@5517.72,3614.17 5527.56,3614.17 5543.31,3598.43 v1(5564.96,3598.43) 5572.83,3598.43 5572.83,3667.32 8R1.2@5606.3,3667.32
  Bottom Layer, Bottom w5.91: 8C3.2@5500,3657.48 5515.75,3673.23 5509.84,3598.43 v1(5564.96,3598.43)
NET00677: 8D1.2 8R1.1 8R3.2 | length 183.2
  Top Layer, Top w5.91: 8R3.2@5527.56,3773.62 5545.28,3773.62 5588.58,3730.32 8R1.1@5600.39,3730.32 ; 8R1.1@5598.43,3728.35 8R1.1@5600.39,3730.32 ; 8R1.1@5606.3,3730.32 8R1.1@5600.39,3730.32 ; 8D1.2@5673.23,3753.94 5673.23,3751.97 5622.05,3751.97 8R1.1@5600.39,3730.32
NET00678: 8R5.1 8R6.2 8R8.2 | length 366.9
  Top Layer, Top w5.91: v1(5744.09,3598.43) 5748.03,3602.36 5748.03,3604.33 5748.03,3606.3 8R6.2@5748.03,3641.73 ; 8R8.2@5862.2,3649.61 5856.3,3649.61 5828.74,3677.17 5771.65,3677.17 8R6.2@5736.22,3641.73 ; 8R6.2@5736.22,3641.73 5744.09,3641.73 5748.03,3645.67 8R6.2@5748.03,3641.73 ; 8R6.2@5736.22,3641.73 8R6.2@5748.03,3641.73
  Bottom Layer, Bottom w5.91: 8R5.1@5685.04,3700.79 5685.04,3633.86 5716.54,3602.36 5732.28,3602.36 5740.16,3602.36 v1(5744.09,3598.43)
NET00679: 8C4.1 8R9.1 8R10.2 | length 351.6
  Bottom Layer, Bottom w5.91: 8C4.1@5767.72,3838.58 5771.65,3838.58 5771.65,3748.03 5783.46,3736.22 5842.52,3736.22 5862.2,3716.54 8R9.1@5862.2,3649.61 8R10.2@5948.82,3649.61
NET00680: 8C5.1 8D1.5 8R11.1 | length 320.3
  Top Layer, Top w5.91: 8C5.1@5830.71,3838.58 5822.83,3838.58 5814.96,3830.71 5814.96,3716.54 5826.77,3704.72 5834.65,3704.72 5858.27,3704.72 8D1.5@5862.2,3702.76 5887.8,3698.82 5887.8,3681.1 5929.13,3671.26 ; 5929.13,3671.26 8R11.1@5929.13,3649.61 5937.01,3661.42 5929.13,3671.26
NET00681: 8C4.2 8D1.6 8D1.7 8R12.2 | length 454.1
  Top Layer, Top w5.91: 8D1.6@5862.2,3728.35 5929.13,3728.35 5933.07,3732.28 ; 8D1.7@5862.2,3753.94 5862.2,3755.91 5929.13,3755.91 5931.1,3757.87 8R12.2@5931.1,3738.19 ; v1(5915.35,3704.72) 5933.07,3732.28 ; 8R12.2@5950.79,3751.97 5933.07,3751.97 8R12.2@5933.07,3738.19 ; 8R12.2@5931.1,3738.19 8R12.2@5933.07,3738.19 ; 8R12.2@5931.1,3738.19 8R12.2@5933.07,3736.22 ; 5933.07,3732.28 5938.98,3738.19 8R12.2@5933.07,3738.19 ; 5933.07,3732.28 8R12.2@5933.07,3736.22 ; 8R12.2@5933.07,3736.22 8R12.2@5933.07,3738.19
  Bottom Layer, Bottom w5.91: 8C4.2@5830.71,3838.58 5889.76,3838.58 5901.57,3826.77 5901.57,3732.28 v1(5915.35,3704.72)
NET00682: 8C7.1 8D2.3 8R15.1 | length 225.4
  Top Layer, Top w5.91: 8C7.1@6007.87,3692.91 8C7.1@6015.75,3692.91 ; 8R15.1@6015.75,3751.97 8C7.1@6015.75,3692.91 ; 8D2.3@6125.98,3637.8 6125.98,3669.29 6114.17,3681.1 6015.75,3681.1 8C7.1@6015.75,3692.91
NET00683: 8C6.1 8R13.1 8R14.2 | length 145.7
  Bottom Layer, Bottom w5.91: 8R13.1@5948.82,3751.97 8R14.2@6015.75,3751.97 8C6.1@6015.75,3673.23
NET00684: 8C8.1 8D2.7 8R17.1 | length 281.7
  Top Layer, Top w5.91: 8D2.7@6100.39,3826.77 6102.36,3822.83 6102.36,3779.53 6114.17,3767.72 v1(6114.17,3751.97)
  Bottom Layer, Bottom w5.91: v1(6114.17,3751.97) 6161.42,3751.97 8R17.1@6212.6,3700.79 6212.6,3645.67 8C8.1@6234.25,3629.92
NET00685: 8C6.2 8D2.1 8D2.2 8D2.5 | length 510.9
  Top Layer, Top w5.91: v1(6031.5,3566.93) 6074.8,3566.93 8D2.1@6074.8,3610.24 ; 8D2.1@6074.8,3637.8 8D2.1@6074.8,3610.24 ; 8D2.2@6100.39,3637.8 6098.43,3625.98 6098.43,3610.24 8D2.1@6074.8,3610.24 ; v1(6149.61,3724.41) 6149.61,3814.96 8D2.5@6151.57,3826.77
  Bottom Layer, Bottom w5.91: 8C6.2@6015.75,3610.24 8C6.2@6031.5,3610.24 ; v1(6031.5,3566.93) 8C6.2@6031.5,3610.24 ; v1(6149.61,3724.41) 6114.17,3724.41 6051.18,3661.42 6051.18,3629.92 8C6.2@6031.5,3610.24
NET00686: 8D2.6 8R16.1 8R17.2 8R18.1 | length 310
  Top Layer, Top w5.91: 8D2.6@6125.98,3826.77 6125.98,3854.33 6125.98,3858.27 6137.8,3870.08 6188.98,3870.08 6200.79,3858.27 6200.79,3854.33 8R16.1@6200.79,3834.65 6200.79,3775.59 6206.69,3775.59 8R18.1@6218.5,3763.78 v1(6259.84,3763.78)
  Bottom Layer, Bottom w5.91: 8R17.2@6212.6,3763.78 v1(6259.84,3763.78)
NET00689: 8C8.2 8D3.3 8R19.1 | length 332.5
  Top Layer, Top w5.91: 8R19.1@6232.28,3582.68 v1(6279.53,3590.55) 6279.53,3618.11 6334.65,3673.23 8D3.3@6334.65,3759.84
  Bottom Layer, Bottom w5.91: 8C8.2@6234.25,3547.24 6232.28,3547.24 6232.28,3562.99 6279.53,3562.99 v1(6279.53,3590.55)
NET00690: 8D3.2 8R20.1 8R21.2 8R22.1 | length 238.5
  Top Layer, Top w5.91: 8D3.2@6360.24,3759.84 6362.2,3759.84 6362.2,3822.83 6374.02,3822.83 6374.02,3826.77 8R20.1@6381.89,3834.65 6389.76,3826.77 6389.76,3822.83 v1(6421.26,3822.83) 6425.2,3826.77 8R21.2@6472.44,3826.77
  Bottom Layer, Bottom w5.91: 8R22.1@6374.02,3822.83 v1(6421.26,3822.83)
NET00691: 8D3.1 8R21.1 8R23.2 | length 234.2
  Top Layer, Top w5.91: 8D3.1@6385.83,3759.84 6385.83,3763.78 8R21.1@6472.44,3763.78 6496.06,3763.78 6519.69,3787.4 v1(6519.69,3826.77)
  Bottom Layer, Bottom w5.91: 8R23.2@6472.44,3826.77 6488.19,3826.77 v1(6519.69,3826.77)
NET00694: 8C9.1 8D3.6 8R23.1 8R26.2 | length 585.7
  Top Layer, Top w5.91: 8D3.6@6334.65,3570.87 6334.65,3618.11 6401.57,3685.04 v1(6425.2,3685.04) 6425.2,3629.92 6464.57,3590.55 8R26.2@6464.57,3570.87
  Bottom Layer, Bottom w5.91: 8R23.1@6472.44,3763.78 6425.2,3716.54 v1(6425.2,3685.04) 6437.01,3673.23 6500,3673.23 6511.81,3661.42 6511.81,3582.68 8C9.1@6527.56,3578.74
NET00695: 8C9.2 8D3.7 8R27.2 | length 505.2
  Top Layer, Top w5.91: 8D3.7@6360.24,3570.87 6362.2,3570.87 6362.2,3610.24 6368.11,3616.14 6403.54,3616.14 6419.29,3600.39 v1(6419.29,3598.43) ; 8R27.2@6566.93,3696.85 6570.87,3696.85 6606.3,3661.42 6606.3,3562.99 v1(6594.49,3551.18)
  Bottom Layer, Bottom w5.91: v1(6419.29,3598.43) 6464.57,3598.43 8C9.2@6464.57,3578.74 6464.57,3555.12 6476.38,3543.31 6586.61,3543.31 v1(6594.49,3551.18)
NET00696: 8R26.1 8R27.1 8R28.1 | length 160.7
  Top Layer, Top w5.91: 8R26.1@6527.56,3570.87 6535.43,3578.74 v1(6566.93,3578.74) 8R27.1@6566.93,3633.86
  Bottom Layer, Bottom w5.91: v1(6566.93,3578.74) 8R28.1@6566.93,3641.73
NET00698: 8D3.5 8R24.1 8R25.1 | length 408.8
  Top Layer, Top w5.91: 8D3.5@6309.06,3570.87 6311.02,3570.87 6311.02,3625.98 6401.57,3716.54 6472.44,3716.54 8R24.1@6472.44,3704.72 6492.13,3704.72 6492.13,3716.54 v1(6519.69,3744.09)
  Bottom Layer, Bottom w5.91: 8R25.1@6472.44,3704.72 6492.13,3704.72 6492.13,3716.54 v1(6519.69,3744.09)
OUT1: 1C10_.2 1R28.2 XS4.2 | length 1832.7
  Mid-Layer 3, Top-Mid w7.87: v1(4649.61,5244.09) 4645.67,5240.16 4645.67,4854.33 4602.36,4811.02 4602.36,4318.9 4637.8,4283.46 v1(4653.54,4283.46)
  Bottom Layer, Bottom w5.91: XS4.2@4511.81,4281.5 4655.51,4281.5 v1(4653.54,4283.46) ; v1(4649.61,5244.09) 4748.03,5342.52 5001.97,5342.52 1C10_.2@5151.57,5492.13 ; 1C10_.2@5141.73,5492.13 1C10_.2@5151.57,5492.13 ; 1R28.2@5212.6,5492.13 1C10_.2@5151.57,5492.13
OUT2: 2C10.2 2R28.2 XS4.3 | length 1472.1
  Bottom Layer, Bottom w5.91: XS4.3@4511.81,4330.71 4669.29,4330.71 4681.1,4318.9 4681.1,4114.17 4779.53,4015.75 5165.35,4015.75 5275.59,3905.51 5275.59,3653.54 5240.16,3618.11 2R28.2@5200.79,3618.11 2C10.2@5129.92,3618.11
OUT3: 3C10.2 3R28.2 XS4.4 | length 2509.1
  Mid-Layer 3, Top-Mid w7.87: v1(4645.67,4381.89) 4618.11,4409.45 4618.11,4590.55 4633.86,4606.3 4889.76,4606.3 5088.58,4805.12 5785.43,4805.12 5866.14,4885.83 5866.14,4933.07 5883.86,4950.79 6322.83,4950.79 6419.29,4854.33 v1(6440.94,4854.33)
  Bottom Layer, Bottom w5.91: XS4.4@4511.81,4379.92 4511.81,4381.89 v1(4645.67,4381.89) v1@4645.67,4385.83 ; 3C10.2@6389.76,4917.32 3R28.2@6389.76,4862.2 6397.64,4854.33 v1(6440.94,4854.33)
OUT4: 4C10.2 4R28.2 XS4.5 | length 2647.7
  Mid-Layer 3, Top-Mid w7.87: v1(6492.13,4133.86) 6444.88,4181.1 5818.9,4181.1 5732.28,4267.72 v1(5732.28,4287.4) ; v1(5732.28,4287.4) 5732.28,4291.34 5728.35,4295.28 5728.35,4291.34 v1(5732.28,4287.4)
  Bottom Layer, Bottom w5.91: XS4.5@4511.81,4429.13 4641.73,4429.13 4696.85,4374.02 4696.85,4129.92 4740.16,4086.61 5098.43,4086.61 5133.86,4122.05 5133.86,4236.22 5165.35,4267.72 5594.49,4267.72 5629.92,4303.15 5700.79,4303.15 5708.66,4295.28 5728.35,4295.28 5732.28,4291.34 v1(5732.28,4287.4) ; 4R28.2@6429.13,4090.55 4C10.2@6429.13,4145.67 6480.31,4145.67 v1(6492.13,4133.86)
OUT5: 5C10.2 5R28.2 XS4.6 | length 3347.2
  Mid-Layer 3, Top-Mid w7.87: v1(4653.54,4795.28) 4661.42,4795.28 4661.42,4877.95 v1(4759.84,4976.38) ; v1(5846.46,5456.69) 5846.46,5661.42 5901.57,5716.54 6507.87,5716.54 v1(6598.43,5625.98)
  Bottom Layer, Bottom w5.91: XS4.6@4511.81,4478.35 4647.64,4478.35 4677.17,4507.87 4677.17,4771.65 v1(4653.54,4795.28) ; v1(4759.84,4976.38) 4755.91,4980.31 4751.97,4980.31 4732.28,5000 4732.28,5173.23 4838.58,5279.53 5122.05,5279.53 5122.05,5370.08 5171.26,5419.29 5269.69,5419.29 5311.02,5460.63 5620.08,5460.63 5643.7,5437.01 5809.06,5437.01 v1(5846.46,5456.69) ; 5C10.2@6539.37,5681.1 5R28.2@6539.37,5625.98 v1(6598.43,5625.98)
OUT6: 6C10.2 6R28.2 XS4.7 | length 2579.9
  Mid-Layer 3, Top-Mid w7.87: v1(4645.67,4527.56) 4814.96,4527.56 4818.9,4523.62 v1(4822.83,4527.56) ; v1(5744.09,5078.74) 5870.08,5078.74 5885.83,5094.49 6120.08,5094.49 6198.82,5173.23 6346.46,5173.23 6437.01,5263.78 v1(6448.82,5263.78)
  Bottom Layer, Bottom w5.91: XS4.7@4511.81,4527.56 v1(4645.67,4527.56) ; v1(4822.83,4527.56) 4822.83,4708.66 5143.7,5031.5 5143.7,5098.43 5346.46,5098.43 5379.92,5041.34 5446.85,5041.34 5484.25,5084.65 5507.87,5084.65 5519.69,5072.83 5724.41,5072.83 v1(5744.09,5078.74) ; 6C10.2@6389.76,5299.21 6R28.2@6389.76,5244.09 6429.13,5244.09 v1(6448.82,5263.78)
OUT7: 7C10.2 7R28.2 XS4.8 | length 3026.9
  Mid-Layer 3, Top-Mid w7.87: v1(4645.67,4578.74) 4655.51,4588.58 4836.61,4588.58 4858.27,4566.93 4858.27,4452.76 4842.52,4437.01 ; v1(5787.4,4303.15) 5787.4,4352.36 5822.83,4387.8 5933.07,4387.8 5990.16,4330.71 6139.76,4330.71 6165.35,4305.12 6421.26,4305.12 6476.38,4360.24 v1(6476.38,4429.13) ; 4842.52,4437.01 4834.65,4429.13 v1(4830.71,4429.13) 4838.58,4437.01 4842.52,4437.01
  Bottom Layer, Bottom w5.91: XS4.8@4511.81,4576.77 4511.81,4578.74 v1(4645.67,4578.74) ; v1@4838.58,4437.01 v1(4830.71,4429.13) 4830.71,4114.17 4846.46,4098.43 5090.55,4098.43 5118.11,4125.98 5118.11,4240.16 5157.48,4279.53 5586.61,4279.53 5622.05,4314.96 5775.59,4314.96 v1(5787.4,4303.15) v1@5783.46,4299.21 ; 7C10.2@6389.76,4531.5 7R28.2@6389.76,4476.38 6433.07,4476.38 6466.54,4442.91 6466.54,4438.98 v1(6476.38,4429.13)
OUT8: 8C10.2 8R28.2 XS4.9 | length 2836.8
  Mid-Layer 3, Top-Mid w7.87: v1(5409.45,3909.45) 5409.45,3913.39 5838.58,3913.39 5937.01,3814.96 6259.84,3814.96 6287.4,3787.4 v1@6612.2,3787.4 ; v1@6608.27,3791.34 v1@6612.2,3787.4 ; v1@6612.2,3787.4 v1@6614.17,3785.43 ; v1@6612.2,3787.4 v1(6614.17,3787.4) ; v1@6614.17,3785.43 v1(6614.17,3787.4) ; v1@6614.17,3785.43 6618.11,3781.5 6618.11,3783.46 v1(6614.17,3787.4)
  Mid-Layer 4, Bop-Mid w7.87: v1(4649.61,4633.86) 4807.09,4633.86 5098.43,4342.52 v1(5098.43,4039.37)
  Bottom Layer, Bottom w5.91: XS4.9@4511.81,4625.98 4641.73,4625.98 v1(4649.61,4633.86) ; v1(5098.43,4039.37) 5161.42,4039.37 5303.15,3897.64 5303.15,3874.02 5405.51,3874.02 v1(5409.45,3909.45) ; 8R28.2@6566.93,3704.72 8C10.2@6566.93,3759.84 6594.49,3787.4 v1(6614.17,3787.4)
REF: 1R24.2 2R24.2 3R24.2 4R24.2 5R24.2 6R24.2 7R24.2 8R24.2 C12.1 C13.1 D4.6 | length 6949.8
  Top Layer, Top w5.91: v1(4992.13,4051.18) 4992.13,4511.81 4771.65,4732.28 4771.65,4909.45 4842.52,4980.31 5074.8,4980.31 5102.36,5007.87 C12.1@5102.36,5019.69 ; D4.6@5050.71,5232.68 D4.6@5049.45,5231.42 ; D4.6@5061.02,5234.25 D4.6@5059.06,5236.22 ; 5107.87,5234.25 5108.07,5234.45 5121.85,5234.45 ; C13.1@5122.05,5102.36 C13.1@5090.55,5102.36 5098.43,5110.24 5118.11,5110.24 C13.1@5122.05,5110.24 ; 5122.05,5234.65 5107.87,5234.65 5064.49,5234.65 5062.91,5236.22 D4.6@5059.06,5236.22 ; v1(5496.06,5055.12) 5511.81,5070.87 5669.29,5070.87 5688.98,5051.18 5874.02,5051.18 5885.83,5039.37 6007.87,5039.37 6039.37,5070.87 6318.9,5070.87 ; 7R24.2@6295.28,4413.39 6318.9,4389.76 6318.9,4314.96 6334.65,4299.21 6464.57,4299.21 ; 3R24.2@6295.28,4799.21 6318.9,4775.59 6318.9,4704.72 6354.33,4669.29 6476.38,4669.29 ; 6R24.2@6295.28,5181.1 6318.9,5157.48 6318.9,5070.87 ; 4R24.2@6334.65,4027.56 6358.27,4003.94 6358.27,3929.13 6381.89,3905.51 6547.24,3905.51 ; 5R24.2@6444.88,5562.99 6468.5,5539.37 6468.5,5468.5 6484.25,5452.76 6484.25,5157.48 6417.32,5090.55 6417.32,5070.87 ; 8R24.2@6472.44,3641.73 6480.31,3641.73 6496.06,3657.48 6511.81,3673.23 6511.81,3700.79 6547.24,3736.22 6547.24,3905.51 ; D4.6@5049.45,5231.42 5048.35,5230.31 5047.24,5230.31 D4.6@5049.45,5231.42 ; D4.6@5049.45,5231.42 D4.6@5059.06,5236.22 ; 6318.9,5070.87 6417.32,5070.87 ; 6417.32,5070.87 6417.32,4933.07 6476.38,4874.02 6476.38,4669.29 ; 6464.57,4299.21 6464.57,4370.08 6503.94,4409.45 6503.94,4480.31 6476.38,4507.87 6476.38,4669.29 ; 6464.57,4299.21 6464.57,4255.91 6547.24,4173.23 6547.24,3905.51
  Top Layer, Top w11.81: v1(4988.19,5374.02) 5092.52,5374.02 5122.05,5344.49 5122.05,5234.65 ; D4.6@5061.02,5234.25 5107.87,5234.25 5122.05,5234.25 v1(5122.05,5165.35) C13.1@5122.05,5110.24 ; C12.1@5102.36,5019.69 5122.05,5039.37 C13.1@5122.05,5102.36 ; 5107.87,5234.65 5108.07,5234.45
  Mid-Layer 3, Top-Mid w7.87: v1(4992.13,4051.18) 4992.13,3805.12 5047.24,3750 v1(5047.24,3736.22) ; v1(5122.05,5165.35) 5125.98,5169.29 5255.91,5169.29 5370.08,5055.12 v1(5496.06,5055.12)
  Bottom Layer, Bottom w5.91: v1(4988.19,5374.02) 4988.19,5379.92 5019.69,5411.42 5019.69,5433.07 1R24.2@5011.81,5433.07 ; 2R24.2@4996.06,3685.04 5000,3685.04 5047.24,3732.28 v1(5047.24,3736.22)
pads on no net: D4.1 D4.3 D4.5 D4.7 XS2.4 XS2.5 XS2.6 XS2.10 XS2.12 XS2.15 XS2.16 XS2.17 XS2.19 XS2.25 XS2.26 XS2.31 XS2.32 XS2.33 XS2.35 XS2.36 XS2.37 XS2.38 XS2.39 XS2.40 XS2.42 XS3.2 XS3.4 XS3.5 XS3.6 XS3.7 XS3.9 XS3.11 XS3.13 XS3.15 XS3.16 XS3.17 XS3.19 XS3.21 XS3.23 XS3.24 XS3.25 XS3.26 XS3.27 XS3.28 XS3.30 XS3.31 XS3.32 XS3.33 XS3.34 XS3.35 XS3.37 XS3.38 XS3.39 XS3.40 XS3.41 XS4.10 XS4.11 XS4.12 XS4.13 XS4.20 XS4.21 XS4.31 XS4.32 XS4.33 XS4.34 XS4.41 XS4.42

## Polygon pours and split planes (outlines as drawn)
GND on Mid-Layer 1, Top-Int "Mid-Layer 1, Top-Int-GND" (solid, pour order 0): 4527.56,3287.4 4527.56,3338.58 4527.56,3368.11 4531.5,3397.64 4547.24,3417.32 4566.93,3429.13 4598.43,3437.01 4818.9,3437.01 4850.39,3417.32 4870.08,3393.7 4870.08,3295.28 6035.43,3287.4 6035.43,3385.83 6055.12,3409.45 6070.87,3429.13 6326.77,3429.13 6358.27,3409.45 6370.08,3385.83 6370.08,3287.4 6570.87,3287.4 6592.52,3305.12 6604.33,3320.87 6610.24,3350.39 6616.14,3381.89 6629.92,3417.32 6643.7,3454.72 6645.67,3728.35 6736.22,3818.9 6736.22,4090.55 6755.91,4122.05 6881.89,4122.05 6881.89,5283.46 6846.46,5283.46 6822.83,5283.46 6807.09,5283.46 6791.34,5287.4 6755.91,5303.15 6736.22,5330.71 6736.22,5559.06 6610.24,5681.1 6610.24,6015.75 6606.3,6070.87 6594.49,6098.43 6576.77,6114.17 6370.08,6114.17 6370.08,6031.5 6358.27,5992.13 6338.58,5976.38 6322.83,5968.5 6094.49,5968.5 6047.24,5984.25 6031.5,6023.62 6031.5,6106.3 4866.14,6110.24 4866.14,6027.56 4858.27,5992.13 4838.58,5980.31 4818.9,5968.5 4566.93,5968.5 4539.37,5980.31 4521.65,6011.81 4521.65,6106.3 4287.4,6106.3 4039.37,6106.3 4003.94,6094.49 4003.94,5503.94 4059.06,5448.82 4090.55,5397.64 4291.34,5397.64 4326.77,5389.76 4364.17,5375.98 4377.95,5360.24 4389.76,5342.52 4405.51,5303.15 4405.51,4110.24 4389.76,4059.06 4370.08,4027.56 4326.77,4007.87 4090.55,4007.87 4074.8,3972.44 4049.21,3942.91 4019.68,3921.26 4011.81,3338.58 4070.87,3287.4 4181.1,3287.4 4303.15,3287.4
GND on Mid-Layer 2, Bop-Int "Mid-Layer 2, Bop-Int-GND" (solid, pour order 1): 4525.59,3289.37 4525.59,3332.68 4525.59,3368.11 4529.53,3399.61 4545.28,3419.29 4564.96,3431.1 4596.46,3431.1 4816.93,3431.1 4848.43,3411.42 4868.11,3387.8 4868.11,3289.37 6033.46,3287.4 6033.46,3381.89 6049.21,3407.48 6068.9,3423.23 6324.8,3423.23 6356.3,3403.54 6368.11,3379.92 6368.11,3289.37 6568.9,3291.34 6590.55,3305.12 6602.36,3318.9 6604.33,3330.71 6606.3,3346.46 6612.2,3375.98 6616.14,3393.7 6624.02,3411.42 6637.8,3450.79 6643.7,3722.44 6734.25,3812.99 6734.25,4084.65 6753.94,4116.14 6879.92,4116.14 6879.92,5285.43 6840.55,5285.43 6812.99,5285.43 6789.37,5289.37 6757.87,5305.12 6734.25,5332.68 6734.25,5557.09 6608.27,5675.2 6604.33,6009.84 6604.33,6041.34 6604.33,6072.83 6592.52,6100.39 6576.77,6114.17 6368.11,6114.17 6368.11,6025.59 6352.36,5990.16 6332.68,5974.41 6320.87,5970.47 6092.52,5970.47 6049.21,5986.22 6029.53,6017.72 6029.53,6112.2 4864.17,6112.2 4864.17,6021.65 4852.36,5986.22 4816.93,5970.47 4564.96,5970.47 4541.34,5984.25 4519.69,6009.84 4519.69,6108.27 4285.43,6108.27 4037.4,6108.27 4001.97,6088.58 4001.97,5498.03 4061.02,5442.91 4090.55,5395.67 4291.34,5395.67 4309.06,5393.7 4324.8,5391.73 4346.46,5385.83 4368.11,5375.98 4391.73,5340.55 4407.48,5305.12 4407.48,4104.33 4387.8,4053.15 4362.2,4025.59 4324.8,4009.84 4090.55,4009.84 4068.9,3964.57 4041.34,3940.94 4013.78,3919.29 4009.84,3332.68 4072.83,3289.37

## Keep-outs
Keep-Out Layer, Board:
  lines w3.94: 3818.95,5677.79 cw(c3813.03,5628.89) 3862.2,5625.98 ; 3820.82,5677.24 cw(c3852.36,5799.21) 3828.76,5922.97 ; 3821.88,3716.73 ccw(c3852.36,3594.49) 3828.76,3470.74 ; 3822.83,3716.54 ccw(c3809.37,3767.77) 3862.2,3771.65 ; 3828.8,3470.77 cw(c3805.12,3395.67) 3883.86,3395.67 3883.86,3318.9 ccw(c3950.79,3318.9) 3950.79,3251.97 4555.12,3251.97 4555.12,3354.33 cw(c4594.49,3354.33) 4594.49,3393.7 4791.34,3393.7 cw(c4791.34,3354.33) 4830.71,3354.33 4830.71,3251.97 6062.99,3251.97 6062.99,3354.33 cw(c6102.36,3354.33) 6102.36,3393.7 6299.21,3393.7 cw(c6299.21,3354.33) 6338.58,3354.33 6338.58,3251.97 6568.9,3251.97 ccw(c6568.9,3318.9) 6635.83,3318.9 cw(c6844.49,3318.9) 6844.49,3527.56 ccw(c6844.49,3594.49) 6911.42,3594.49 6911.42,3805.12 6809.06,3805.12 cw(c6809.06,3844.49) 6769.68,3844.49 6769.69,4041.34 cw(c6809.06,4041.34) 6809.06,4080.71 6911.42,4080.71 6911.42,5312.99 6809.06,5312.99 cw(c6809.06,5352.36) 6769.68,5352.36 6769.69,5549.21 cw(c6809.06,5549.21) 6809.06,5588.58 6911.42,5588.58 6911.42,5799.21 ccw(c6844.49,5799.21) 6844.49,5866.14 cw(c6844.49,6074.8) 6635.83,6074.8 ccw(c6568.9,6074.8) 6568.9,6141.73 6338.58,6141.73 6338.58,6039.37 cw(c6299.21,6039.37) 6299.21,6000 6102.36,6000 cw(c6102.36,6039.37) 6062.99,6039.37 6062.99,6141.73 4830.71,6141.73 4830.71,6039.37 cw(c4791.34,6039.37) 4791.34,6000 4594.49,6000 cw(c4594.49,6039.37) 4555.12,6039.37 4555.12,6141.73 3950.79,6141.73 ccw(c3950.79,6074.8) 3883.86,6074.8 3883.86,5998.03 cw(c3805.12,5998.03) 3828.8,5922.94 ; 3862.13,3842.77 cw(c3933.07,3832.68) 3924.96,3903.87 ; 3862.2,3765.75 3862.2,3842.52 ; 3862.2,5549.21 3862.2,5627.95 ; 3862.2,5551.2 ccw(c3931.1,5559.06) 3917.16,5491.13 ; 3916.69,5491.65 cw(c3874.02,5287.4) 4069.72,5359.79 ; 3924.5,3903.83 ccw(c3874.02,4106.3) 4069.72,4033.91 ; 4068.9,4033.46 4293.31,4033.46 ccw(c4293.31,4112.2) 4372.05,4112.2 4372.05,5281.5 ccw(c4293.31,5281.5) 4293.31,5360.24 4068.9,5360.24

## Silkscreen, mask and mechanical layers (free items; w line width, h text height)
Top Overlay, Top Silk:
  lines w10: 4828.74,5332.68 4828.74,5334.65 4874.02,5334.65 4875.98,5332.68 ; 4872.05,5157.48 4874.02,5159.45 4874.02,5356.3 4875.98,5354.33 5009.84,5354.33 5011.81,5352.36 5011.81,5155.51 5009.84,5157.48 4874.02,5157.48